# EAGLE board 12xHalfBridge-1.0 (EAGLE 6.4)
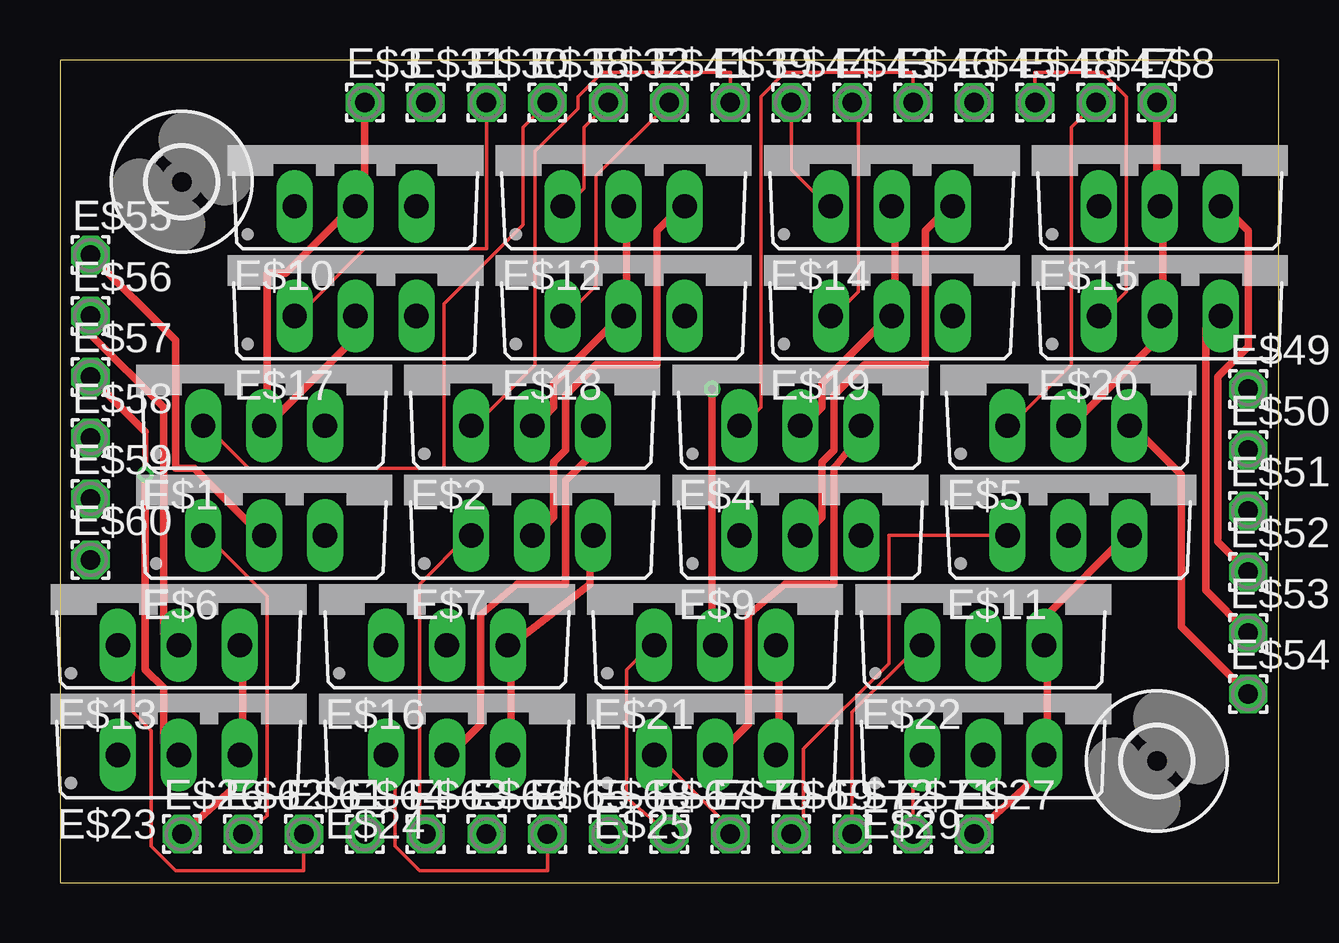
[diagram p0: board, top side]
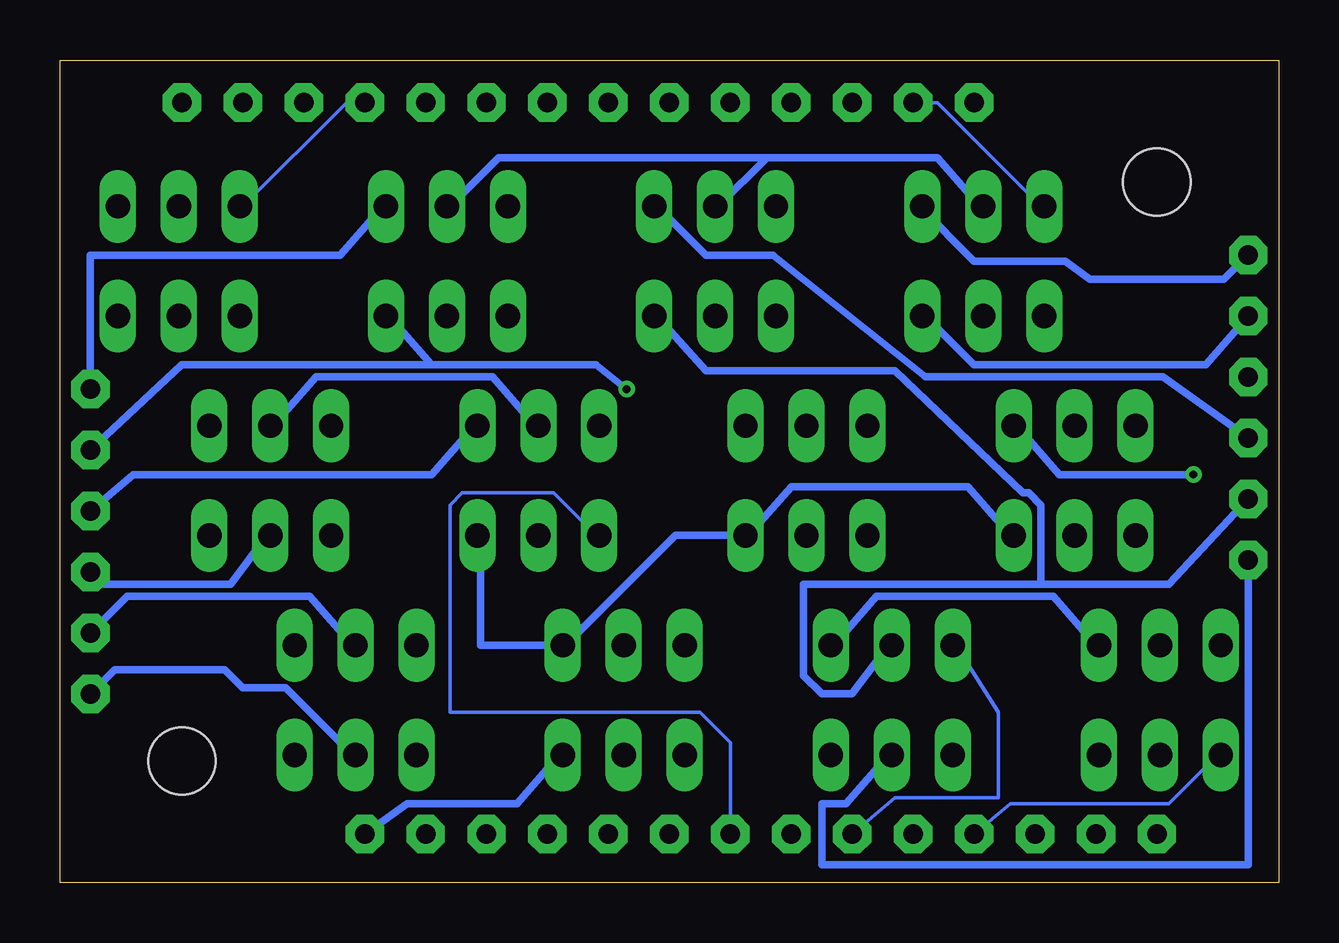
[diagram p1: board, bottom side, seen from below]

Size 50.8 x 34.29 mm. Coordinates in mm from the lower left corner, seen from the top.
Outline: 0,34.29 0,0 50.8,0 50.8,34.29 0,34.29
Copper layers (1*16): Top 0.0356mm / dielectric 1.5011mm / Bottom 0.0356mm
Design rules "LaenPCBOrder": minimum track width 6mil, minimum drill 13mil, track to track 6mil, track to pad 6mil, pad to pad 6mil, via to via 6mil, smd to smd 6mil, copper to edge 15mil, drill to drill 6mil, minimum pad ring 7mil, minimum via ring 7mil, stop-mask expansion 4mil, vias tented up to drill 0mil, thermal gap 10mil

## Footprints (pad centres in the part's own frame; a part is rotated, then mirrored left to right if it is on the bottom)
TO220V = drill 1.016 long: 1 -2.54,-2.54; 2 0,-2.54; 3 2.54,-2.54
1,6/0,8 = drill 0.813 pad 1.6 octagon: 1 0,0
2,8 = hole 2.8: 0,0

## Placement (x,y rotation side)
E$1  [TO220V]  8.51,21.59 0 top
E$2  [TO220V]  19.68,21.59 0 top
E$3  [1,6/0,8]  12.7,32.51 0 top
E$4  [TO220V]  30.86,21.59 0 top
E$5  [TO220V]  42.04,21.59 0 top
E$6  [TO220V]  8.51,17.02 0 top
E$7  [TO220V]  19.68,17.02 0 top
E$8  [1,6/0,8]  45.72,32.51 0 top
E$9  [TO220V]  30.86,17.02 0 top
E$10  [TO220V]  12.32,30.73 0 top
E$11  [TO220V]  42.04,17.02 0 top
E$12  [TO220V]  23.5,30.73 0 top
E$13  [TO220V]  4.95,12.45 0 top
E$14  [TO220V]  34.67,30.73 0 top
E$15  [TO220V]  45.85,30.73 0 top
E$16  [TO220V]  16.13,12.45 0 top
E$17  [TO220V]  12.32,26.16 0 top
E$18  [TO220V]  23.5,26.16 0 top
E$19  [TO220V]  34.67,26.16 0 top
E$20  [TO220V]  45.85,26.16 0 top
E$21  [TO220V]  27.3,12.45 0 top
E$22  [TO220V]  38.48,12.45 0 top
E$23  [TO220V]  4.95,7.87 0 top
E$24  [TO220V]  16.13,7.87 0 top
E$25  [TO220V]  27.3,7.87 0 top
E$26  [1,6/0,8]  5.08,2.03 0 top
E$27  [1,6/0,8]  38.1,2.03 0 top
E$29  [TO220V]  38.48,7.87 0 top
E$30  [1,6/0,8]  17.78,32.51 0 top
E$31  [1,6/0,8]  15.24,32.51 0 top
E$32  [1,6/0,8]  22.86,32.51 0 top
E$38  [1,6/0,8]  20.32,32.51 0 top
E$39  [1,6/0,8]  27.94,32.51 0 top
E$40  [2,8]  5.08,29.21 0 top
E$41  [1,6/0,8]  25.4,32.51 0 top
E$42  [2,8]  45.72,5.08 0 top
E$43  [1,6/0,8]  33.02,32.51 0 top
E$44  [1,6/0,8]  30.48,32.51 0 top
E$45  [1,6/0,8]  38.1,32.51 0 top
E$46  [1,6/0,8]  35.56,32.51 0 top
E$47  [1,6/0,8]  43.18,32.51 0 top
E$48  [1,6/0,8]  40.64,32.51 0 top
E$49  [1,6/0,8]  49.53,20.57 0 top
E$50  [1,6/0,8]  49.53,18.03 0 top
E$51  [1,6/0,8]  49.53,15.49 0 top
E$52  [1,6/0,8]  49.53,12.95 0 top
E$53  [1,6/0,8]  49.53,10.41 0 top
E$54  [1,6/0,8]  49.53,7.87 0 top
E$55  [1,6/0,8]  1.27,26.16 0 top
E$56  [1,6/0,8]  1.27,23.62 0 top
E$57  [1,6/0,8]  1.27,21.08 0 top
E$58  [1,6/0,8]  1.27,18.54 0 top
E$59  [1,6/0,8]  1.27,16 0 top
E$60  [1,6/0,8]  1.27,13.46 0 top
E$61  [1,6/0,8]  10.16,2.03 0 top
E$62  [1,6/0,8]  7.62,2.03 0 top
E$63  [1,6/0,8]  15.24,2.03 0 top
E$64  [1,6/0,8]  12.7,2.03 0 top
E$65  [1,6/0,8]  20.32,2.03 0 top
E$66  [1,6/0,8]  17.78,2.03 0 top
E$67  [1,6/0,8]  25.4,2.03 0 top
E$68  [1,6/0,8]  22.86,2.03 0 top
E$69  [1,6/0,8]  30.48,2.03 0 top
E$70  [1,6/0,8]  27.94,2.03 0 top
E$71  [1,6/0,8]  35.56,2.03 0 top
E$72  [1,6/0,8]  33.02,2.03 0 top

## Library data of the parts
E$1 E$2 E$4-E$7 E$9-E$25 E$29 = transistor-pnp
E$3 E$8 E$26 E$27 E$30-E$32 E$38 E$39 E$41 E$43-E$72 = wirepad
E$40 E$42 = holes

## Nets
S$1: E$17.1 E$30.1
S$2: E$10.1 E$31.1
S$3: E$12.1 E$32.1
S$4: E$2.1 E$39.1
S$5: E$19.1 E$43.1
S$6: E$15.1 E$45.1
S$7: E$5.1 E$47.1
S$8: E$9.2 E$14.3 E$49.1
S$9: E$19.3 E$21.2 E$50.1
S$10: E$4.3 E$25.2 E$51.1
S$11: E$11.2 E$15.3 E$52.1
S$12: E$20.3 E$22.2 E$53.1
S$13: E$5.3 E$29.2 E$54.1
S$14: E$6.2 E$10.3 E$55.1
S$15: E$13.2 E$17.3 E$56.1
S$16: E$1.1 E$38.1
S$17: E$1.3 E$23.2 E$57.1
S$18: E$18.1 E$41.1
S$19: E$7.2 E$12.3 E$58.1
S$20: E$6.1 E$62.1
S$21: E$16.2 E$18.3 E$59.1
S$22: E$2.3 E$24.2 E$60.1
S$23: E$13.1 E$61.1
S$24: E$7.1 E$63.1
S$25: E$24.1 E$65.1
S$26: E$21.1 E$67.1
S$27: E$11.1 E$69.1
S$28: E$29.1 E$71.1
S$29: E$23.1 E$64.1
S$30: E$16.1 E$66.1
S$31: E$9.1 E$68.1
S$32: E$25.1 E$70.1
S$33: E$22.1 E$72.1
S$34: E$14.1 E$44.1
S$35: E$4.1 E$46.1
S$36: E$20.1 E$48.1
S$37: E$1.2 E$2.2 E$3.1 E$4.2 E$5.2 E$8.1 E$10.2 E$12.2 E$14.2 E$15.2 E$17.2 E$18.2 E$19.2 E$20.2
S$38: E$6.3 E$7.3 E$9.3 E$11.3 E$13.3 E$16.3 E$21.3 E$22.3 E$23.3 E$24.3 E$25.3 E$26.1 E$27.1 E$29.3

## Tracks (layer width: path | path; a pad name or v marks a point on that pad's centre or on a via)
S$1
  Top 0.152: E$30.1 17.78,26.42 12.7,26.42 9.91,23.62 E$17.1
S$2
  Bottom 0.152: E$31.1 14.22,32.51 9.91,28.19 E$10.1
S$3
  Top 0.152: E$32.1 21.84,31.5 21.84,28.96 21.08,28.19 E$12.1
S$4
  Top 0.152: E$39.1 27.94,33.78 22.61,33.78 21.59,32.77 21.59,32.26 19.81,30.48 19.81,21.59 17.27,19.05 E$2.1
S$5
  Top 0.152: E$43.1 33.27,32.26 33.27,24.64 32.26,23.62 E$19.1
S$6
  Bottom 0.152: E$45.1 38.86,32.51 43.18,28.19 E$15.1
S$7
  Top 0.152: E$47.1 42.16,31.5 42.16,21.59 39.62,19.05 E$5.1
S$8
  Top 0.152: 37.08,28.19 E$14.3
  Top 0.305: 37.08,28.19 36.07,27.18 36.07,21.59 33.53,21.59 32.26,20.32 32.26,18.03 31.75,17.53 31.75,15.24 30.99,14.48 E$9.2
  Bottom 0.305: E$49.1 49.53,26.16 39.12,26.16 37.34,28.19 E$14.3
S$9  (via drill 0.33)
  Top 0.152: 27.18,9.91 E$21.2
  Top 0.305: v27.18,20.57 27.18,9.91
  Bottom 0.152: 37.08,23.62 E$19.3
  Bottom 0.305: v27.18,20.57 28.45,21.59 35.31,21.59 | 37.08,23.62 35.31,21.59 | E$50.1 45.72,21.59 35.31,21.59
S$10
  Top 0.152: 33.27,19.05 E$4.3
  Top 0.305: 33.27,19.05 33.27,18.54 32.26,17.27 32.26,12.45 30.23,12.45 28.7,11.18 28.7,6.6 27.43,5.33 E$25.2
  Bottom 0.305: E$51.1 47.75,17.02 35.31,17.02 33.53,19.05 E$4.3
S$11
  Top 0.305: E$52.1 48.26,14.22 48.26,21.08 49.53,22.35 49.53,27.18 48.51,28.19 E$15.3
  Bottom 0.152: 42.16,14.48 E$11.2
  Bottom 0.305: 42.16,14.48 43.69,12.45 49.28,12.45 E$52.1
S$12
  Top 0.305: E$53.1 47.75,12.19 47.75,23.11 48.26,23.62 E$20.3
  Bottom 0.305: E$53.1 48.01,11.94 40.39,11.94 38.61,9.91 E$22.2
S$13
  Top 0.305: E$54.1 46.74,10.67 46.74,17.02 44.7,19.05 E$5.3
  Bottom 0.305: E$54.1 48.51,8.89 43.94,8.89 43.18,8.13 41.4,8.13 38.61,5.33 E$29.2
S$14
  Top 0.152: 8.38,14.48 E$6.2
  Top 0.305: 8.38,14.48 5.59,17.27 4.83,17.27 4.83,22.61 E$55.1
  Bottom 0.152: 14.99,28.19 E$10.3
  Bottom 0.305: 14.99,28.19 12.7,25.91 8.89,25.91 7.87,25.15 2.29,25.15 E$55.1
S$15
  Top 0.254: 4.32,10.41 4.83,9.91 E$13.2 | E$56.1 1.27,22.86
  Top 0.305: 4.32,10.41 4.32,19.81 1.27,22.86
  Bottom 0.152: 14.73,23.62 E$17.3
  Bottom 0.305: 14.73,23.62 12.7,21.59 3.05,21.59 E$56.1
S$16
  Top 0.152: E$38.1 19.3,31.5 19.3,27.43 16,24.13 16,17.27 7.87,17.27 6.1,19.05 E$1.1
S$17  (via drill 0.33)
  Top 0.152: 4.83,5.33 E$23.2
  Top 0.254: 3.56,18.8 v3.56,17.02
  Top 0.305: 4.83,5.33 4.32,5.84 4.32,8.13 3.56,8.89 v3.56,17.02 | E$57.1 3.56,18.8
  Bottom 0.152: 10.92,19.05 E$1.3
  Bottom 0.305: 10.92,19.05 9.14,17.02 v3.56,17.02
S$18
  Top 0.152: E$41.1 22.35,29.46 22.35,24.89 21.08,23.62 E$18.1
S$19
  Top 0.152: 25.91,28.19 E$12.3
  Top 0.305: 25.91,28.19 24.89,27.18 24.89,21.59 22.35,21.59 21.08,20.32 21.08,18.03 20.57,17.53 20.57,15.24 19.81,14.48 E$7.2
  Bottom 0.152: 25.91,28.19 E$12.3
  Bottom 0.305: E$58.1 4.83,21.08 14.73,21.08 21.08,26.16 23.88,26.16 25.91,28.19
S$20
  Top 0.152: E$62.1 8.64,2.79 8.64,11.94 6.1,14.48 E$6.1
S$21
  Bottom 0.152: 25.91,23.62 E$18.3
  Bottom 0.305: 9.91,12.45 4.57,12.45 E$59.1 | 9.91,12.45 19.81,12.45 19.81,8.64 19.05,7.87 17.78,7.87 16.26,9.91 E$16.2 | 25.91,23.62 23.88,21.34 16,21.34 10.67,16.26 10.41,16.26 9.91,15.75 9.91,12.45
S$22
  Top 0.152: 22.1,19.05 E$2.3
  Top 0.305: 22.1,19.05 22.1,17.78 21.08,16.76 21.08,12.45 19.05,12.45 17.53,11.18 17.53,6.6 16.26,5.33 E$24.2
  Bottom 0.152: 16.26,5.33 E$24.2
  Bottom 0.305: E$60.1 1.27,0.76 19.05,0.76 19.05,3.3 18.03,3.3 16.26,5.33
S$23
  Top 0.152: E$61.1 10.16,0.51 4.83,0.51 3.81,1.52 3.81,6.35 3.05,7.11 3.05,9.4 2.54,9.91 E$13.1
S$24
  Top 0.152: E$63.1 14.99,2.03 14.99,12.45 17.02,14.48 E$7.1
S$25
  Top 0.152: E$65.1 20.32,0.51 14.99,0.51 13.97,1.52 13.97,5.08 13.72,5.33 E$24.1
S$26
  Top 0.152: E$67.1 23.62,3.56 23.62,8.89 24.64,9.91 E$21.1
S$27
  Top 0.152: E$11.1 34.54,14.48 34.54,9.14 30.99,5.59 30.99,2.29 E$69.1
S$28
  Top 0.152: E$71.1 35.56,5.08 35.81,5.33 E$29.1
S$29
  Bottom 0.152: E$64.1 11.18,3.3 4.57,3.3 2.54,5.33 E$23.1
S$30
  Bottom 0.152: E$66.1 16,3.56 11.68,3.56 11.68,7.11 13.46,9.91 E$16.1
S$31
  Bottom 0.152: E$68.1 22.86,5.84 24.13,7.11 34.54,7.11 34.54,15.75 34.04,16.26 30.23,16.26 28.45,14.48 E$9.1
S$32
  Top 0.152: E$70.1 27.94,2.29 24.89,5.33 E$25.1
S$33
  Top 0.152: E$72.1 33.02,7.11 35.81,9.91 E$22.1
S$34
  Top 0.152: E$44.1 30.48,29.72 32,28.19 E$14.1
S$35
  Top 0.152: E$46.1 35.56,33.78 30.23,33.78 29.21,32.77 29.21,19.81 28.45,19.05 E$4.1
S$36
  Top 0.152: E$48.1 40.64,33.78 43.43,33.78 44.45,32.77 44.45,24.64 43.43,23.62 E$20.1
S$37
  Top 0.152: 45.72,28.19 E$15.2 | 42.16,19.05 E$5.2 | 45.97,23.62 E$20.2 | 34.8,28.19 E$14.2 | 34.8,23.62 E$19.2 | 19.81,19.05 E$2.2 | 23.37,23.62 E$18.2 23.62,23.62 | 23.62,28.19 E$12.2 | 12.45,28.19 E$10.2 | 12.19,23.62 E$17.2 | 8.64,19.05 E$1.2
  Top 0.305: E$8.1 45.72,28.19 | 42.16,19.05 45.72,22.61 45.72,23.62 E$20.2 | 45.97,23.62 45.97,28.19 E$15.2 | E$4.2 30.99,19.05 31.75,19.81 31.75,20.83 34.54,23.62 E$19.2 | 34.8,23.62 34.8,28.19 | 19.81,19.05 20.57,19.81 20.57,20.83 23.37,23.62 | 23.62,23.62 23.62,28.19 | 12.45,28.19 12.7,28.45 E$3.1 | 12.19,23.62 12.19,22.61 8.64,19.05 8.64,25.4 9.4,25.4 12.19,28.19 E$10.2
  Bottom 0.152: 23.37,28.19 E$12.2 | 34.54,28.19 E$14.2 | 41.91,19.05 E$5.2
  Bottom 0.305: 21.34,30.23 23.37,28.19 | 21.34,30.23 14.22,30.23 12.45,28.19 E$10.2 | 34.54,28.19 32.51,30.23 21.34,30.23 | 41.91,19.05 40.13,21.08 32.77,21.08 30.99,19.05 E$4.2
S$38
  Top 0.152: 41.15,5.33 E$29.3 40.89,5.33 | 44.45,14.48 E$11.3 | 41.15,9.91 E$22.3 | 29.97,5.33 E$25.3 | 29.97,9.91 E$21.3 | 7.62,9.91 E$13.3 | 18.8,5.33 E$24.3 | 18.8,9.91 E$16.3 | 22.1,14.48 E$7.3
  Top 0.305: 41.15,5.33 41.15,9.91 41.15,11.18 44.45,14.48 | E$27.1 40.89,4.57 40.89,5.33 | 29.97,9.91 29.97,5.33 | 7.62,9.91 7.62,5.33 E$23.3 7.37,5.33 7.37,4.06 E$26.1 | 18.8,5.33 18.8,9.91 22.1,12.45 22.1,14.48
  Bottom 0.152: 33.27,14.48 E$9.3 | 11.18,14.48 E$6.3 | 22.1,14.48 E$7.3 | 18.54,9.91 E$16.3 | 29.72,9.91 E$21.3 | 29.97,5.33 E$25.3
  Bottom 0.305: 33.27,14.48 33.27,9.91 E$21.3 | 11.18,14.48 12.95,16.51 20.32,16.51 22.1,14.48 | 18.54,9.91 16.76,11.94 9.4,11.94 7.62,9.91 E$13.3 | 29.72,9.91 25.15,14.48 E$7.3 | E$27.1 36.32,3.3 31.75,3.3 29.97,5.33

## Text on the board
tNames: 12x Half Bridge | VDD | H1 | H2 | H3 | H4 | H5 | H6 | H7 | H8 | H9 | H10 | H11 | H12 | VDD | O1 | O2 | O3 | O4 | O7 | O5 | O8 | O6 | O9 | O10 | O11 | O12 | Brent M. Spell | GND | L1 | L2 | L3 | L4 | L5 | L6 | L7 | L8 | L9 | L10 | L11 | L12 | GND